# Altium PCB LeBot.PcbDoc (part 2 of 2)
Units mm, origin at the board's own origin, x right, y up, seen from the top; angles counter-clockwise.
Board outline 72.75 x 51.14 mm, 4 copper layers (Top Layer, Low Impedance, Power, Bottom Layer), stack 0.778 mm thick; 105 components, 96 nets, 418 pads, 258 vias.
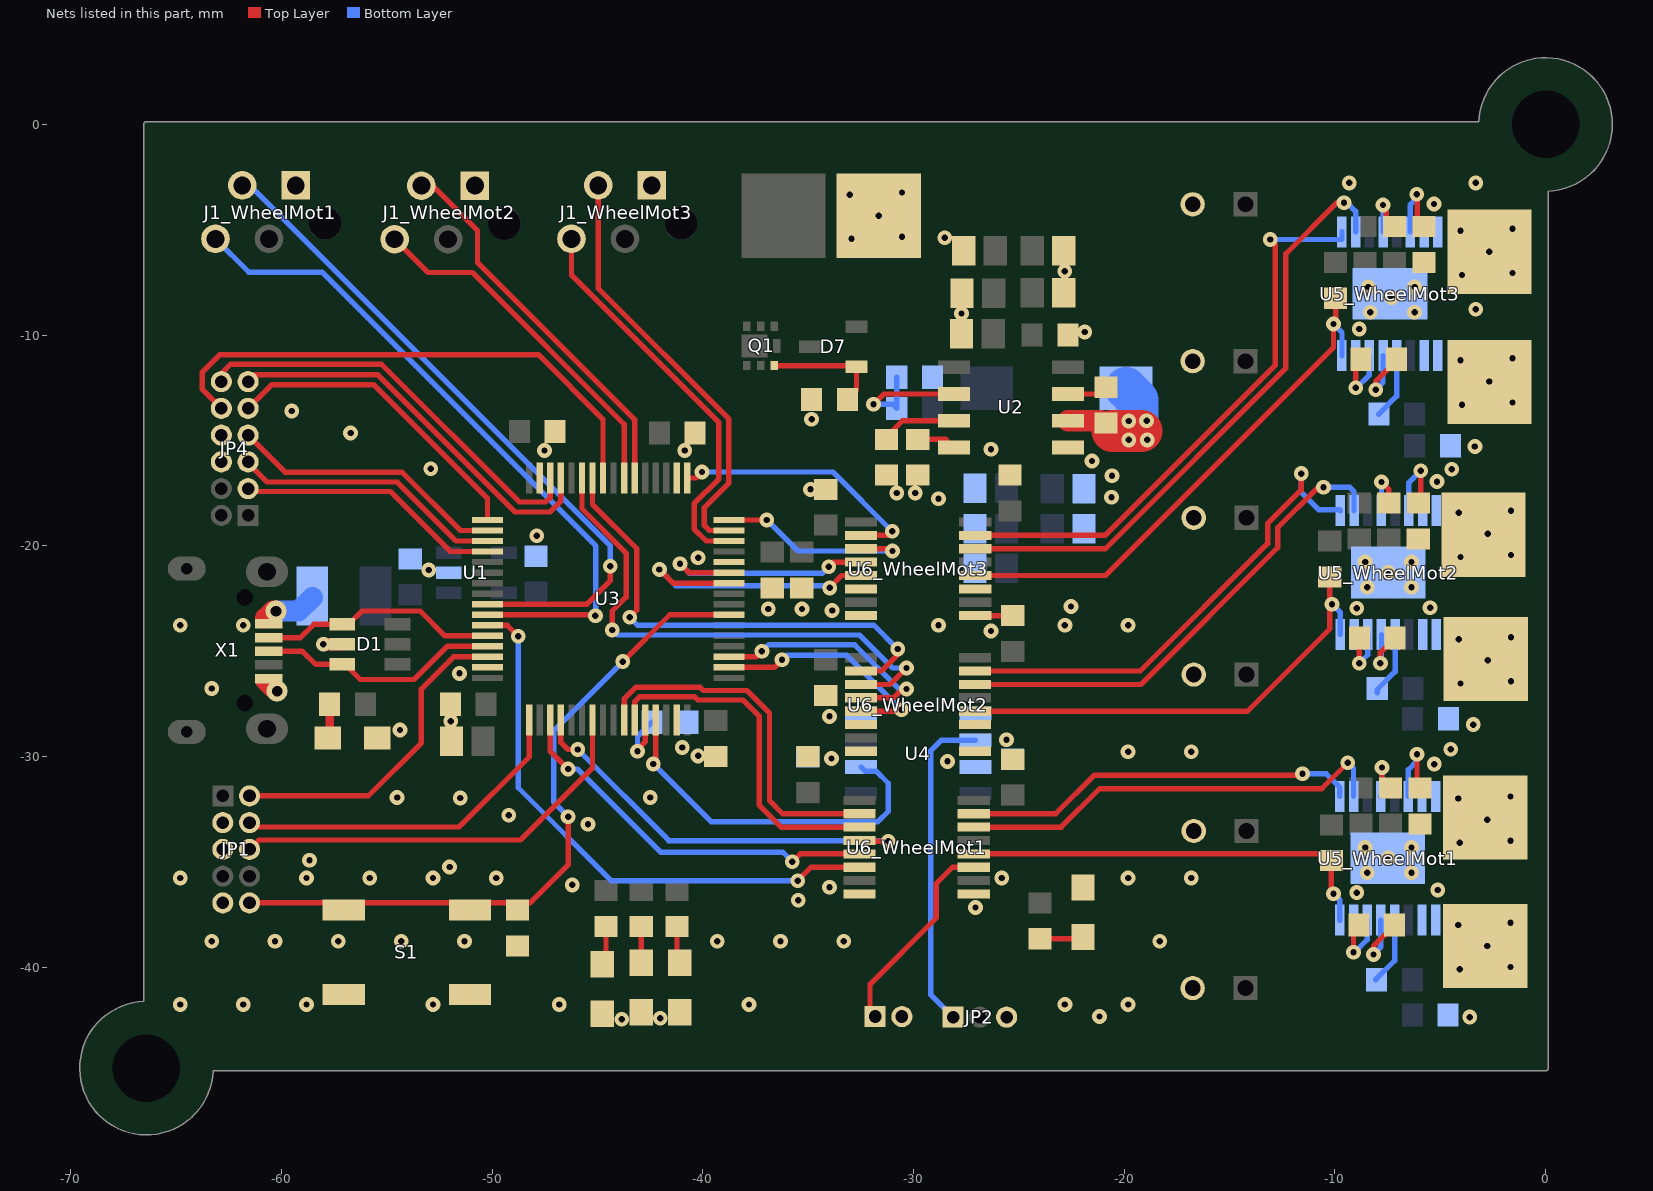
[diagram p4: the nets of this part, all layers, seen from the top]

## Via types
v1: diameter 0.7, hole 0.3, Top Layer to Bottom Layer, 256 vias
v2: diameter 1, hole 0.5, Top Layer to Bottom Layer, 2 vias

## Nets (pads, with @x,y where several pads share a name; then routed paths per layer and width w, separated by ;. In a path a pad name is that pad's centre, name@x,y a point inside that pad or via, vN(x,y) a via of type N, cw(c..) or ccw(c..) an arc to the next point about the centre after c; other vN are vias at no path point) (continued)
FREE2: JP4.10 U3.25 | length 25.5
  Top Layer w0.254: JP4.10@-62.861,-13.48 -63.761,-12.58 -63.761,-11.757 -62.933,-10.929 -47.812,-10.929 -44.741,-14 U3.25@-44.741,-16.787
FREE3: JP4.3 U3.36 | length 12.6
  Top Layer w0.254: JP4.3@-61.591,-17.4 -61.564,-17.427 -54.839,-17.427 -51.991,-20.275 U3.36@-50.229,-20.275
FREE4: JP4.5 U3.35 | length 12.9
  Top Layer w0.254: JP4.5@-61.591,-16.075 -60.693,-16.973 -54.518,-16.973 -51.716,-19.775 U3.35@-50.229,-19.775
FREE5: JP4.7 U3.34 | length 13.2
  Top Layer w0.254: JP4.7@-61.591,-14.75 -59.822,-16.519 -54.272,-16.519 -51.516,-19.275 U3.34@-50.229,-19.275
GND: C1.1 C2.1 C11.1 C12.1 C13.1 C14.1 C15.1 C16.1 C17.1 C18.1 C26_WheelMot1.1 C26_WheelMot2.1 C26_WheelMot3.1 C32.1 D1.2 D3.2 D4.2 D5.2 D6.2 J1_WheelMot1.1 J1_WheelMot2.1 J1_WheelMot3.1 JP1.3 JP1.5 JP1.9 JP4.6 JP4.8 R7.1 S1.2 U1.2 U3.12 U3.18 U3.31 U3.47 U3.63 U4.4 U6_WheelMot1.8 U6_WheelMot2.8 U6_WheelMot3.8 X1.GND | length 1.8
  Top Layer w0.6: X1.GND@-60.941,-26.475 -60.516,-26.9 v2(-60.216,-26.9) ; v1@-57.991,-24.7 -57.966,-24.675 D1.2@-57.116,-24.675
  other v1: -43.854,-42.475 -42.029,-42.425 -64.816,-41.775 -61.816,-41.775 -58.816,-41.775 -52.816,-41.775 -46.816,-41.775 -37.816,-41.775 -63.316,-38.775 -60.316,-38.775 -57.316,-38.775 -54.316,-38.775 -51.316,-38.775 -39.316,-38.775 -36.316,-38.775 -33.316,-38.775 -35.475,-36.825 -33.991,-36.212 -46.2,-36.1 -64.816,-35.775 -58.816,-35.775 -55.816,-35.775 -52.816,-35.775 -49.816,-35.775 -52.025,-35.25 -58.675,-34.925 -45.454,-33.215 -49.216,-32.796 -51.516,-31.975 -54.516,-31.95 -42.5,-31.95 -33.9,-30.1 -40.229,-29.975 -40.979,-29.575 -54.379,-28.75 -51.966,-28.325 -33.991,-28.1 -63.316,-26.775 -51.554,-26.06 -58.016,-24.675 -64.816,-23.775 -61.816,-23.775 -33.867,-23.075 -36.9,-23 -35.3,-23 -53.016,-21.15 -40.229,-20.575 -47.891,-19.525 -34.893,-17.325 -52.925,-16.35 -47.516,-15.475 -40.866,-15.475 -56.725,-14.65 -59.52,-13.6
GND_B: C3.1 C4.1 C5.1 C7.1 C8.1 C9.1 C10.1 C19.1 C20.1 C21.1 C22.1 C25_WheelMot1.1 C25_WheelMot2.1 C25_WheelMot3.1 C27_WheelMot1.1 C27_WheelMot2.1 C27_WheelMot3.1 C28.1 C29.1 C30_WheelMot1.2 C30_WheelMot2.2 C30_WheelMot3.2 C31_WheelMot1.2 C31_WheelMot2.2 C31_WheelMot3.2 C33.1 D2.2 J3.1 JP2.3 JP3.2 R3.1 R13_WheelMot1.1 R13_WheelMot2.1 R13_WheelMot3.1 R14.2 U2.5 U4.5 U4.7 U5_WheelMot1.7 U5_WheelMot1.9 U5_WheelMot1.15 U5_WheelMot1.17 U5_WheelMot2.7 U5_WheelMot2.9 U5_WheelMot2.15 U5_WheelMot2.17 U5_WheelMot3.7 U5_WheelMot3.9 U5_WheelMot3.15 U5_WheelMot3.17 U6_WheelMot1.9 U6_WheelMot2.9 U6_WheelMot3.9 | length 1.8
  Top Layer w0.254: U6_WheelMot3.9@-27.069,-23.316 -25.295,-23.316 C27_WheelMot2.1@-25.291,-23.312
  other v1: -3.6,-42.375 -21.171,-42.35 -22.816,-41.775 -19.816,-41.775 -18.316,-38.775 -27.063,-37.175 -8.966,-36.465 -5.116,-36.34 -25.816,-35.775 -19.816,-35.775 -16.816,-35.775 -8.466,-35.525 -6.366,-35.525 -7.466,-34.825 -8.566,-34.325 -6.366,-34.325 -5.279,-30.365 -28.391,-30.237 -19.816,-29.775 -16.816,-29.775 -4.504,-29.665 -25.591,-29.212 -3.429,-28.49 -26.329,-24.05 -28.816,-23.775 -22.816,-23.775 -19.816,-23.775 -8.966,-22.965 -5.48,-22.94 -22.525,-22.882 -8.466,-21.975 -6.366,-21.975 -7.466,-21.275 -8.566,-20.775 -6.366,-20.775 -28.816,-17.775 -20.604,-17.7 -30.798,-17.5 -29.916,-17.5 -5.15,-16.956 -20.58,-16.675 -4.454,-16.365 -21.529,-15.975 -26.329,-15.425 -3.354,-15.29 -34.841,-14 -21.875,-9.85 -8.841,-9.715 -27.725,-8.975 -8.316,-8.915 -6.216,-8.915 -3.316,-8.775 -7.316,-8.215 -8.416,-7.715 -6.216,-7.715 -22.825,-6.975 -32.948,-5.431 -28.525,-5.375 -30.548,-5.331 -31.648,-4.331 -5.291,-3.78 -33.023,-3.331 -30.548,-3.231 -9.316,-2.775 -3.316,-2.775
IN1_B_WheelMot1: U5_WheelMot1.1 U6_WheelMot1.15 | length 18.8
  Top Layer w0.254: U6_WheelMot1.15@-27.141,-32.721 -23.255,-32.721 -21.434,-30.9 v1@-11.6,-30.9 ; v1@-11.6,-30.884 v1(-11.541,-30.825)
  Bottom Layer w0.254: v1(-11.541,-30.825) -10.416,-30.825 -9.766,-31.475 U5_WheelMot1.1@-9.766,-31.9
IN1_B_WheelMot2: U5_WheelMot2.1 U6_WheelMot2.15 | length 23.5
  Top Layer w0.254: U6_WheelMot2.15@-27.08,-25.949 -19.24,-25.949 -13.19,-19.898 -13.19,-18.951 -11.6,-17.361 v1(-11.6,-16.575)
  Bottom Layer w0.254: v1(-11.6,-16.575) -11.6,-17.456 -10.769,-18.287 -9.791,-18.287 U5_WheelMot2.1@-9.741,-18.337
IN1_B_WheelMot3: U5_WheelMot3.1 U6_WheelMot3.15 | length 27.4
  Top Layer w0.254: U6_WheelMot3.15@-27.063,-19.512 U6_WheelMot3.15@-27.069,-19.506 -20.906,-19.506 -12.825,-11.425 -12.825,-5.706 v1(-13.066,-5.465)
  Bottom Layer w0.254: v1(-13.066,-5.465) -9.666,-5.465 U5_WheelMot3.1@-9.666,-5.1
IN2_B_WheelMot1: U5_WheelMot1.2 U6_WheelMot1.14 | length 20.7
  Top Layer w0.254: U6_WheelMot1.14@-27.141,-33.357 -22.992,-33.357 -21.171,-31.536 -10.627,-31.536 v1(-9.391,-30.3)
  Bottom Layer w0.254: v1(-9.391,-30.3) -9.116,-30.575 U5_WheelMot1.2@-9.116,-31.9
IN2_B_WheelMot2: U5_WheelMot2.2 U6_WheelMot2.14 | length 23.4
  Top Layer w0.254: U6_WheelMot2.14@-27.08,-26.585 -19.21,-26.585 -12.718,-20.093 -12.718,-19.146 -10.797,-17.225 v1(-10.541,-17.225)
  Bottom Layer w0.254: v1(-10.541,-17.225) -9.291,-17.225 -9.091,-17.425 U5_WheelMot2.2@-9.091,-18.337
IN2_B_WheelMot3: U5_WheelMot3.2 U6_WheelMot3.14 | length 29.2
  Top Layer w0.254: U6_WheelMot3.14@-27.069,-20.142 -20.9,-20.142 -12.325,-11.567 -12.325,-6.14 -9.9,-3.715 v1(-9.566,-3.715)
  Bottom Layer w0.254: v1(-9.566,-3.715) -9.426,-3.715 -9.016,-4.125 U5_WheelMot3.2@-9.016,-5.1
M1_EN: U3.52 U6_WheelMot1.4 | length 19.9
  Top Layer w0.254: U3.52@-46.741,-28.263 -46.741,-29.338 -46.404,-29.675 v1(-45.941,-29.675) ; U6_WheelMot1.4@-32.563,-33.991 -32.529,-34.025 v1(-31.204,-34.025)
  Bottom Layer w0.254: v1(-45.941,-29.675) -41.616,-34 v1@-31.179,-34
M1_ENC_A: J1_WheelMot1.3 U3.41 | length 32.2
  Top Layer w0.254: U3.41@-50.229,-22.775 -45.504,-22.775 -44.404,-21.675 v1(-44.404,-20.975)
  Bottom Layer w0.254: J1_WheelMot1.3@-61.541,-2.859 -44.404,-19.996 v1(-44.404,-20.975)
M1_ENC_B: J1_WheelMot1.4 U3.42 | length 32.8
  Top Layer w0.254: U3.42@-50.229,-23.275 -45.266,-23.275 -45.266,-23.475 -45.116,-23.325 v1(-45.104,-23.325)
  Bottom Layer w0.254: J1_WheelMot1.4@-63.14,-5.431 -61.56,-7.011 -58.089,-7.011 -45.081,-20.019 -45.081,-23.302 v1(-45.104,-23.325)
M1_PMODE: U3.51 U6_WheelMot1.5 | length 18.5
  Top Layer w0.254: U3.51@-47.241,-28.263 -47.241,-29.759 v1(-46.4,-30.6) ; v1(-35.754,-35) -35.381,-34.627 -32.598,-34.627 -32.58,-34.61 U6_WheelMot1.5@-32.563,-34.627
  Bottom Layer w0.254: v1(-46.4,-30.6) -45.951,-30.6 -42.008,-34.543 -36.211,-34.543 v1(-35.754,-35)
M1_PWM1: U3.58 U6_WheelMot1.2 | length 17.3
  Top Layer w0.254: U3.58@-43.741,-28.263 -43.741,-27.271 -43.192,-26.722 -40.132,-26.722 -39.983,-26.871 -37.909,-26.871 -36.839,-27.941 -36.839,-32.096 -36.215,-32.721 U6_WheelMot1.2@-32.563,-32.721
M1_PWM2: U3.59 U6_WheelMot1.3 | length 16.6
  Top Layer w0.254: U3.59@-43.241,-28.263 -43.241,-27.413 -43.004,-27.176 -40.391,-27.176 -40.242,-27.325 -38.097,-27.325 -37.334,-28.088 -37.334,-32.301 -36.263,-33.373 ; -36.246,-33.357 U6_WheelMot1.3@-32.563,-33.357
M2_EN: U3.3 U6_WheelMot2.4 | length 12
  Top Layer w0.254: U3.3@-38.753,-25.275 -37.463,-25.275 v1(-37.2,-25.012) ; U6_WheelMot2.4@-32.502,-27.219 -30.96,-27.219 -30.463,-26.722 -30.385,-26.8 v1(-30.336,-26.8)
  Bottom Layer w0.254: v1(-37.2,-25.012) -36.888,-24.7 -32.797,-24.7 -30.697,-26.8 v1(-30.336,-26.8) -30.336,-26.754 v1@-30.369,-26.722
M2_ENC_A: J1_WheelMot2.3 U3.22 | length 18.4
  Top Layer w0.254: J1_WheelMot2.3@-53.366,-2.909 -52.833,-2.909 -50.7,-5.041 -50.7,-6.554 -43.241,-14.013 U3.22@-43.241,-16.787
M2_ENC_B: J1_WheelMot2.4 U3.23 | length 17.1
  Top Layer w0.254: J1_WheelMot2.4@-54.636,-5.449 -53.056,-7.029 -50.946,-7.029 -43.741,-14.233 U3.23@-43.741,-16.787
M2_PMODE: U3.2 U6_WheelMot2.5 | length 11.7
  Top Layer w0.254: U3.2@-38.753,-25.775 -36.609,-25.775 v1(-36.246,-25.412) ; U6_WheelMot2.5@-32.502,-27.855 -30.701,-27.855 -30.574,-27.983 v1(-30.574,-27.791)
  Bottom Layer w0.254: v1(-36.246,-25.412) -36.034,-25.2 -33.165,-25.2 v1(-30.574,-27.791)
M2_PWM1: U3.26 U6_WheelMot2.2 | length 23.3
  Top Layer w0.254: U3.26@-45.241,-16.787 -45.241,-18.038 -43.141,-20.138 -43.141,-23.062 v1(-43.479,-23.4) ; U6_WheelMot2.2@-32.502,-25.949 -31.524,-25.949 -30.754,-25.179 v1(-30.754,-24.9)
  Bottom Layer w0.254: v1(-43.479,-23.4) -43.104,-23.775 -31.879,-23.775 v1(-30.754,-24.9)
M2_PWM2: U3.27 U6_WheelMot2.3 | length 25.6
  Top Layer w0.254: U3.27@-45.741,-16.787 -45.741,-18.245 -43.641,-20.345 -43.641,-22.437 -44.304,-23.1 v1(-44.304,-24) ; U6_WheelMot2.3@-32.502,-26.585 -31.121,-26.585 v1(-30.336,-25.8)
  Bottom Layer w0.254: v1(-44.304,-24) -44.067,-24.237 -32.563,-24.237 -31,-25.8 v1(-30.336,-25.8)
M3_EN: U3.11 U6_WheelMot3.4 | length 11.5
  Top Layer w0.254: v1(-41.091,-20.85) -40.666,-21.275 U3.11@-38.753,-21.275 ; v1(-34.029,-21) -33.805,-20.776 U6_WheelMot3.4@-32.491,-20.776
  Bottom Layer w0.254: v1(-41.091,-20.85) -40.641,-21.3 -34.329,-21.3 v1(-34.029,-21)
M3_ENC_A: J1_WheelMot3.3 U3.15 | length 20.5
  Top Layer w0.254: J1_WheelMot3.3@-44.97,-2.891 -44.97,-7.78 -38.766,-13.984 -38.766,-17.025 -39.941,-18.2 -39.941,-19.025 -39.691,-19.275 U3.15@-38.753,-19.275
M3_ENC_B: J1_WheelMot3.4 U3.14 | length 19.1
  Top Layer w0.254: J1_WheelMot3.4@-46.24,-5.431 -46.24,-7.152 -39.241,-14.151 -39.241,-16.828 -40.416,-18.003 -40.416,-19.2 -39.841,-19.775 U3.14@-38.753,-19.775
M3_PMODE: U3.10 U6_WheelMot3.5 | length 13.8
  Top Layer w0.254: v1(-42.066,-21.125) -41.416,-21.775 U3.10@-38.753,-21.775 ; v1(-33.979,-22) -33.979,-21.975 -33.416,-21.412 U6_WheelMot3.5@-32.491,-21.412
  Bottom Layer w0.254: v1(-42.066,-21.125) -41.291,-21.9 -34.079,-21.9 v1(-33.979,-22)
M3_PWM1: U3.17 U6_WheelMot3.2 | length 12.6
  Top Layer w0.254: U3.17@-40.741,-16.787 -40.328,-16.787 v1(-40.041,-16.5) ; U6_WheelMot3.2@-32.491,-19.506 -31.21,-19.506 v1(-31.016,-19.312)
  Bottom Layer w0.254: v1(-40.041,-16.5) -33.828,-16.5 v1(-31.016,-19.312)
M3_PWM2: U3.16 U6_WheelMot3.3 | length 9.9
  Top Layer w0.254: U3.16@-38.753,-18.775 v1@-37.004,-18.775 ; U6_WheelMot3.3@-32.491,-20.142 -31.112,-20.142 v1(-31.004,-20.25)
  Bottom Layer w0.254: v1(-36.965,-18.775) -35.49,-20.25 v1(-31.004,-20.25)
MOT_POW_1_WheelMot1: J6_WheelMot1.1 U5_WheelMot1.8
  other v1: -4.066,-34.1 -1.666,-34 -2.766,-33 -4.141,-32 -1.666,-31.9
MOT_POW_1_WheelMot2: J6_WheelMot2.1 U5_WheelMot2.8
  other v1: -4.041,-20.537 -1.641,-20.437 -2.741,-19.437 -4.116,-18.437 -1.641,-18.337
MOT_POW_1_WheelMot3: J6_WheelMot3.1 U5_WheelMot3.8
  other v1: -3.966,-7.15 -1.566,-7.05 -2.666,-6.05 -4.041,-5.05 -1.566,-4.95
MOT_POW_2_WheelMot1: J7_WheelMot1.1 U5_WheelMot1.10
  other v1: -4.066,-40.1 -1.666,-40 -2.766,-39 -4.141,-38 -1.666,-37.9
MOT_POW_2_WheelMot2: J7_WheelMot2.1 U5_WheelMot2.10
  other v1: -4.041,-26.537 -1.641,-26.437 -2.741,-25.437 -4.116,-24.437 -1.641,-24.337
MOT_POW_2_WheelMot3: J7_WheelMot3.1 U5_WheelMot3.10
  other v1: -3.966,-13.3 -1.566,-13.2 -2.666,-12.2 -4.041,-11.2 -1.566,-11.1
MPU_INT: JP4.9 U3.33 | length 15.1
  Top Layer w0.254: JP4.9@-61.591,-13.48 -60.461,-12.35 -55.641,-12.35 -50.229,-17.762 U3.33@-50.229,-18.775
MPU_SCL: JP4.11 U3.29 | length 19
  Top Layer w0.254: JP4.11@-61.591,-12.21 -61.256,-11.875 -55.441,-11.875 -48.916,-18.4 -47.266,-18.4 -46.741,-17.875 U3.29@-46.741,-16.787
MPU_SDA: JP4.12 U3.30 | length 19.7
  Top Layer w0.254: JP4.12@-62.861,-12.21 -62.861,-11.82 -62.424,-11.383 -55.258,-11.383 -48.716,-17.925 -47.466,-17.925 -47.241,-17.7 U3.30@-47.241,-17.025
NetC6_1: C6.1 L1.1 U2.6 | length 5.4
  Top Layer w1: U2.6@-22.663,-14.065 -21.098,-14.065 C6.1@-20.925,-14.238
  Top Layer w2: C6.1@-20.563,-14.55 -19.188,-14.55
  Bottom Layer w2: L1.1@-19.919,-12.525 -19.369,-13.075 -19.369,-14.5
  other v1: -19.788,-14.975 -18.913,-14.975 -19.788,-14.075 -18.938,-14.065
NetC6_2: C6.2 U2.7 | length 1.9
  Top Layer w0.254: U2.7@-22.663,-12.795 -21.058,-12.795 C6.2@-20.863,-12.6
NetC7_2: C7.2 U2.3 | length 3.3
  Top Layer w0.254: C7.2@-31.148,-14.682 -30.531,-14.065 U2.3@-28.087,-14.065
NetC8_2: C8.2 U2.4 | length 1.9
  Top Layer w0.254: C8.2@-29.798,-14.95 -28.472,-14.95 U2.4@-28.087,-15.335
NetC23_WheelMot1_1: C23_WheelMot1.1 U5_WheelMot1.13 | length 3.6
  Top Layer w0.254: v1(-8.166,-39.4) -8.166,-39 C23_WheelMot1.1@-7.166,-38
  Bottom Layer w0.254: v1(-8.166,-39.4) -7.816,-39.05 U5_WheelMot1.13@-7.816,-37.776
NetC23_WheelMot1_2: C23_WheelMot1.2 U5_WheelMot1.14 | length 3.2
  Top Layer w0.254: v1(-9.116,-39.3) -9.116,-38.25 C23_WheelMot1.2@-8.866,-38
  Bottom Layer w0.254: v1(-9.116,-39.3) -9.066,-39.3 -8.466,-38.7 U5_WheelMot1.14@-8.466,-37.776
NetC23_WheelMot2_1: C23_WheelMot2.1 U5_WheelMot2.13 | length 2.9
  Top Layer w0.254: v1(-7.841,-25.575) -7.841,-25.075 C23_WheelMot2.1@-7.141,-24.375
  Bottom Layer w0.254: v1(-7.841,-25.575) -7.791,-25.525 U5_WheelMot2.13@-7.791,-24.213
NetC23_WheelMot2_2: C23_WheelMot2.2 U5_WheelMot2.14 | length 2.7
  Top Layer w0.254: v1(-8.841,-25.575) C23_WheelMot2.2@-8.841,-24.375
  Bottom Layer w0.254: v1(-8.841,-25.575) -8.441,-25.175 U5_WheelMot2.14@-8.441,-24.213
NetC23_WheelMot3_1: C23_WheelMot3.1 U5_WheelMot3.13 | length 3.6
  Top Layer w0.254: v1(-8.066,-12.6) -8.066,-12.2 C23_WheelMot3.1@-7.066,-11.2
  Bottom Layer w0.254: v1(-8.066,-12.6) -7.716,-12.25 U5_WheelMot3.13@-7.716,-10.976
NetC23_WheelMot3_2: C23_WheelMot3.2 U5_WheelMot3.14 | length 3.2
  Top Layer w0.254: v1(-9.016,-12.5) -9.016,-11.45 C23_WheelMot3.2@-8.766,-11.2
  Bottom Layer w0.254: v1(-9.016,-12.5) -8.966,-12.5 -8.366,-11.9 U5_WheelMot3.14@-8.366,-10.976
NetC24_WheelMot1_1: C24_WheelMot1.1 U5_WheelMot1.12 | length 3.2
  Bottom Layer w0.254: C24_WheelMot1.1@-8.066,-40.6 -7.166,-39.7 U5_WheelMot1.12@-7.166,-37.776
NetC24_WheelMot2_1: C24_WheelMot2.1 U5_WheelMot2.12 | length 3.1
  Bottom Layer w0.254: C24_WheelMot2.1@-7.991,-26.975 -7.991,-26.825 -7.141,-25.975 U5_WheelMot2.12@-7.141,-24.213
NetC24_WheelMot3_1: C24_WheelMot3.1 U5_WheelMot3.12 | length 3.1
  Bottom Layer w0.254: C24_WheelMot3.1@-7.916,-13.75 -7.066,-12.9 U5_WheelMot3.12@-7.066,-10.976
NetD2_1: D2.1 R8.1 | length 2.1
  Top Layer w0.254: R8.1@-24.004,-38.655 -22.03,-38.655 D2.1@-21.95,-38.575
NetD3_1: D3.1 R2.1 | length 1.6
  Top Layer w0.4: D3.1@-57.816,-29.125 -57.716,-29.025 R2.1@-57.716,-27.525
NetD4_1: D4.1 R4.1 | length 1.9
  Top Layer w0.254: D4.1@-44.779,-39.865 -44.604,-39.69 R4.1@-44.604,-38.075
NetD5_1: D5.1 R5.1 | length 1.7
  Top Layer w0.254: D5.1@-42.929,-39.8 R5.1@-42.929,-38.075
NetD6_1: D6.1 R6.1 | length 1.8
  Top Layer w0.254: R6.1@-41.229,-38.075 -41.229,-39.675 D6.1@-41.104,-39.8
NetD7_1: D7.1 Q1.2 R14.1 | length 5.6
  Top Layer w0.254: Q1.2@-36.613,-11.45 -32.763,-11.45 D7.1@-32.713,-11.5 -32.713,-12.622 R14.1@-33.141,-13.05
NetF1_1: F1.1 X1.VCC | length 2.6
  Top Layer w1: -60.751,-23.435 -60.416,-23.1 v2(-60.266,-23.1)
  Bottom Layer w1: v2(-60.266,-23.1) -59.191,-23.1 F1.1@-58.541,-22.45
NetR1_1: R1.1 R3.2 U2.2 | length 6.7
  Top Layer w0.254: v1(-31.898,-13.284) -31.41,-12.795 U2.2@-28.087,-12.795
  Bottom Layer w0.254: v1(-31.898,-13.284) -30.994,-13.284 R1.1@-30.798,-13.48 R3.2@-30.798,-12
NetR7_2: R7.2 U3.60 | length 3.3
  Top Layer w0.254: v1(-43.104,-29.75) -43.104,-29.675 -42.741,-29.312 U3.60@-42.741,-28.263
  Bottom Layer w0.254: v1(-43.104,-29.75) -43.104,-29.062 R7.2@-42.416,-28.375
NetR11_WheelMot1_1: R11_WheelMot1.1 U5_WheelMot1.4 | length 2.5
  Top Layer w0.254: v1(-7.766,-30.525) -7.766,-31.1 R11_WheelMot1.1@-7.366,-31.5
  Bottom Layer w0.254: U5_WheelMot1.4@-7.816,-31.9 -7.766,-31.85 v1(-7.766,-30.525)
NetR11_WheelMot2_1: R11_WheelMot2.1 U5_WheelMot2.4 | length 2.5
  Top Layer w0.254: v1(-7.791,-16.975) -7.441,-17.325 R11_WheelMot2.1@-7.441,-17.975
  Bottom Layer w0.254: U5_WheelMot2.4@-7.791,-18.337 v1(-7.791,-16.975)
NetR11_WheelMot3_1: R11_WheelMot3.1 U5_WheelMot3.4 | length 2
  Top Layer w0.254: v1(-7.716,-3.825) -7.566,-3.975 R11_WheelMot3.1@-7.566,-4.525
  Bottom Layer w0.254: U5_WheelMot3.4@-7.716,-5.1 v1(-7.716,-3.825)
NetR13_WheelMot1_2: R13_WheelMot1.2 U5_WheelMot1.6 | length 3.9
  Top Layer w0.254: v1(-6.1,-29.9) -6.1,-31.154 -6.206,-31.26 R13_WheelMot1.2@-5.966,-31.5
  Bottom Layer w0.254: U5_WheelMot1.6@-6.516,-31.9 -6.516,-30.635 -6.1,-30.219 v1(-6.1,-29.9)
NetR13_WheelMot2_2: R13_WheelMot2.2 U5_WheelMot2.6 | length 3.8
  Top Layer w0.254: R13_WheelMot2.2@-6.041,-17.975 -6.141,-17.875 -5.925,-17.659 v1(-5.925,-16.437)
  Bottom Layer w0.254: U5_WheelMot2.6@-6.491,-18.337 -6.491,-17.467 -6.487,-17.463 -6.487,-16.999 v1(-5.925,-16.437)
NetR13_WheelMot3_2: R13_WheelMot3.2 U5_WheelMot3.6 | length 3.5
  Top Layer w0.254: v1(-6.116,-3.32) -6.091,-3.345 R13_WheelMot3.2@-6.091,-4.875
  Bottom Layer w0.254: U5_WheelMot3.6@-6.416,-5.1 -6.416,-3.8 -6.116,-3.5 v1(-6.116,-3.32)
NetU6_WheelMot2_6: U6_WheelMot2.6
NetU6_WheelMot2_11: U6_WheelMot2.11
NetU6_WheelMot3_6: U6_WheelMot3.6
NetU6_WheelMot3_11: U6_WheelMot3.11
PMODE_B_WheelMot1: R9_WheelMot1.1 U5_WheelMot1.16 U6_WheelMot1.12 | length 20
  Top Layer w0.254: U6_WheelMot1.12@-27.141,-34.627 -10.714,-34.627 -10.166,-35.175 -10.166,-36.425 v1(-10.066,-36.525)
  Bottom Layer w0.254: v1(-10.066,-36.525) -9.766,-36.825 U5_WheelMot1.16@-9.766,-37.776
PMODE_B_WheelMot2: R9_WheelMot2.1 U5_WheelMot2.16 U6_WheelMot2.12 | length 22.5
  Top Layer w0.254: U6_WheelMot2.12@-27.08,-27.855 -14.155,-27.855 -10.241,-23.941 R9_WheelMot2.1@-10.241,-21.475
  Bottom Layer w0.254: v1(-10.141,-22.775) -9.741,-23.175 U5_WheelMot2.16@-9.741,-24.213
PMODE_B_WheelMot3: R9_WheelMot3.1 U5_WheelMot3.16 U6_WheelMot3.12 | length 25.5
  Top Layer w0.254: U6_WheelMot3.12@-27.069,-21.412 -20.885,-21.412 -10.066,-10.592 v1(-10.066,-9.475) -9.966,-9.375 R9_WheelMot3.1@-9.966,-8.25
  Bottom Layer w0.254: v1(-10.066,-9.475) -9.666,-9.875 U5_WheelMot3.16@-9.666,-10.976
PWM_SERV: U3.61 U4.2 | length 17.6
  Top Layer w0.254: v1(-42.354,-30.362) -42.241,-30.25 U3.61@-42.241,-28.263
  Bottom Layer w0.254: v1(-42.354,-30.362) -39.616,-33.1 -31.694,-33.1 -31.204,-32.609 -31.204,-31.275 -31.779,-30.7 -32.298,-30.7 U4.2@-32.491,-30.507
PWM_SERV_B: JP2.1 U4.6 | length 15.4
  Bottom Layer w0.254: JP2.1@-28.124,-42.375 -29.191,-41.308 -29.191,-29.737 -28.691,-29.237 U4.6@-27.067,-29.237
RESET: C18.2 JP1.10 S1.1 U3.7 | length 33.1
  Top Layer w0.254: JP1.10@-61.521,-36.955 -51.05,-36.955 -48.205,-36.955 -46.4,-35.15 v1(-46.4,-32.86) ; v1(-43.8,-25.5) -41.575,-23.275 U3.7@-38.753,-23.275
  Bottom Layer w0.254: v1(-46.4,-32.86) -47.077,-32.183 -47.077,-28.777 v1(-43.8,-25.5)
SWCLK: JP1.4 U3.49 | length 16.7
  Top Layer w0.254: JP1.4@-61.666,-33 -61.316,-33.35 -51.575,-33.35 -48.241,-30.016 U3.49@-48.241,-28.263
SWDIO: JP1.2 U3.46 | length 15.5
  Top Layer w0.254: JP1.2@-61.521,-31.875 -55.888,-31.875 -53.366,-29.353 -53.366,-26.8 -51.841,-25.275 U3.46@-50.229,-25.275
SWO: JP1.6 U3.55 | length 20.2
  Top Layer w0.254: JP1.6@-61.521,-34.415 -61.075,-33.969 -48.669,-33.969 -45.241,-30.541 U3.55@-45.241,-28.263
THRW_PWM: U3.43 U6_WheelMot1.6 | length 27.2
  Top Layer w0.254: U3.43@-50.229,-23.775 -49.291,-23.775 v1(-48.766,-24.3) ; v1(-35.504,-35.897) -34.868,-35.261 U6_WheelMot1.6@-32.563,-35.261
  Bottom Layer w0.254: v1(-48.766,-24.3) -48.766,-31.488 -44.357,-35.897 v1(-35.504,-35.897)
THRW_PWM_B: JP3.1 U6_WheelMot1.11 | length 9.5
  Top Layer w0.254: JP3.1@-32.068,-42.106 -32.068,-40.818 -28.922,-37.672 -28.922,-36.034 -28.15,-35.261 U6_WheelMot1.11@-27.141,-35.261
USB_DM: D1.1 U3.44 X1.D- | length 11.2
  Top Layer w0.254: X1.D-@-60.601,-24.36 -59.101,-24.36 -58.466,-23.725 D1.1@-57.116,-23.725 -56.816,-23.725 -56.189,-23.098 -53.418,-23.098 -52.241,-24.275 U3.44@-50.441,-24.275
USB_DP: D1.3 U3.45 X1.D+ | length 11.2
  Top Layer w0.254: X1.D+@-60.601,-25.01 -59.006,-25.01 -58.391,-25.625 D1.3@-57.116,-25.625 -56.991,-25.625 -56.266,-26.35 -53.716,-26.35 -52.141,-24.775 U3.45@-50.641,-24.775
pads on no net: D1.4 D1.6 D7.3 J1_WheelMot1. J1_WheelMot2. J1_WheelMot3. JP1.7 JP1.8 U1.4 U3.4 U3.5 U3.6 U3.8 U3.9 U3.20 U3.21 U3.24 U3.28 U3.37 U3.38 U3.39 U3.50 U3.53 U3.54 U6_WheelMot1.7 U6_WheelMot1.10 U6_WheelMot2.7 U6_WheelMot2.10 U6_WheelMot3.7 U6_WheelMot3.10 X1. X1.7 X1.ID

## Polygon pours and split planes (outlines as drawn)
GND_B on Top Layer "Top Layer-GND_B" (solid, remove dead copper, pour order 122): -36.024,-14.975 -39.425,-11.574 -39.425,-0.625 -0.65,-0.625 -0.65,-44.075 -36.225,-44.075 -29.475,-37.325 -29.475,-18.925 -33.425,-14.975
GND on Top Layer "Top Layer-GND" (solid, remove dead copper, pour order 80): -65.5,-44 -65.5,-0.625 -40.041,-0.625 -40.041,-11.834 -36.15,-15.725 -33.6,-15.725 -30.15,-19.175 -30.15,-36.813 -37.337,-44
no net on Top Layer "Top Layer-No Net 2" (solid, pour order 28): -39.004,-8.868
no net on Top Layer "Top Layer-No Net 3" (solid, pour order 24): 4.084,-43.25
no net on Top Layer "Top Layer-No Net 6" (solid, pour order 0): -65.916,-2.25
GND on Bottom Layer "Bottom Layer-GND" (solid, remove dead copper, pour order 74): -65.5,-44.05 -65.5,-0.675 -40.041,-0.675 -40.041,-12.709 -37.025,-15.725 -33.6,-15.725 -30.15,-19.175 -30.15,-36.813 -37.387,-44.05
GND_B on Bottom Layer "Bottom Layer-GND_B" (solid, remove dead copper, pour order 116): -36.7,-14.975 -39.425,-12.25 -39.425,-0.625 -0.65,-0.625 -0.65,-44.075 -36.225,-44.075 -29.475,-37.325 -29.475,-18.925 -33.425,-14.975
BAT on Bottom Layer "Bottom Layer-BAT" (solid, pour order 98): -6.275,-24.2 -6.275,-25.775 -5.658,-26.392 -5.658,-29.008 -6.125,-29.475 -9.85,-29.475 -10.425,-30.05 -11.225,-30.05 -11.225,-26.275 -11.065,-26.115 -8.865,-26.115 -6.8,-24.05
BAT on Bottom Layer "Bottom Layer-No Net 4" (solid, pour order 94): -6.625,-10.9 -6.987,-13.938 -7.081,-14.367 -11.025,-13.025 -11.025,-16.825 -5.741,-16.825 -5.705,-13.224 -6.116,-12.742 -6.116,-10.9
MOT_POW_1_WheelMot1 on Bottom Layer "Bottom Layer-MOT_POW_1_WheelMot1" (solid, pour order 114): -5.425,-31.6 -5.425,-33.275 -3.925,-34.775 -1.625,-34.775 -0.725,-33.875 -0.725,-31.475 -1.5,-30.7 -1.525,-30.725 -3.6,-30.725 -4.475,-31.6
MOT_POW_1_WheelMot2 on Bottom Layer "Bottom Layer-MOT_POW_1_WheelMot2" (solid, pour order 112): -5.4,-18.037 -5.4,-19.712 -3.9,-21.212 -1.6,-21.212 -0.7,-20.312 -0.7,-17.912 -1.475,-17.137 -1.5,-17.162 -3.575,-17.162 -4.45,-18.037
MOT_POW_1_WheelMot3 on Bottom Layer "Bottom Layer-MOT_POW_1_WheelMot3" (solid, pour order 110): -5.325,-4.8 -5.325,-6.475 -3.825,-7.975 -1.525,-7.975 -0.625,-7.075 -0.625,-4.675 -1.4,-3.9 -1.425,-3.925 -3.5,-3.925 -4.375,-4.8
MOT_POW_2_WheelMot3 on Bottom Layer "Bottom Layer-MOT_POW_2_WheelMot3" (solid, pour order 106): -6.116,-10.81 -6.116,-12.134 -4.076,-14.174 -1.486,-14.174 -0.825,-13.513 -0.825,-10.463 -1.425,-9.863 -3.5,-9.863 -5.275,-11.638 -5.35,-11.713
MOT_POW_2_WheelMot1 on Bottom Layer "Bottom Layer-MOT_POW_2_WheelMot1" (solid, pour order 102): -6.075,-37.776 -6.075,-39.016 -4.117,-40.974 -1.586,-40.974 -0.925,-40.313 -0.925,-37.263 -1.525,-36.663 -3.6,-36.663 -5.375,-38.438 -5.45,-38.513
MOT_POW_2_WheelMot2 on Bottom Layer "Bottom Layer-MOT_POW_2_WheelMot2" (solid, pour order 100): -6.05,-24.212 -6.05,-25.425 -4.064,-27.411 -1.561,-27.411 -0.9,-26.75 -0.9,-23.7 -1.5,-23.1 -3.575,-23.1 -5.35,-24.875 -5.425,-24.95
BAT on Bottom Layer "Bottom Layer-No Net 4" (solid, pour order 92): -6.725,-37.7 -7.087,-40.738 -7.181,-41.167 -11.125,-39.825 -11.125,-43.4 -5.8,-43.4 -5.475,-41.6 -5.475,-40.304 -6.216,-39.129 -6.216,-38.391 -6.216,-37.7
GND on Power "Power-GND" (solid, remove dead copper, pour order 76): -65.5,-44 -65.5,-0.6 -40.041,-0.6 -40.041,-12.734 -37.05,-15.725 -33.6,-15.725 -30.15,-19.175 -30.15,-36.813 -37.337,-44
GND_B on Power "Power-GND_B" (solid, remove dead copper, pour order 118): -36.7,-14.975 -39.425,-12.25 -39.425,-0.625 -0.65,-0.625 -0.65,-44.075 -36.225,-44.075 -29.475,-37.325 -29.475,-18.925 -33.425,-14.975
BAT on Power "Power-BAT" (solid, pour order 84): -36.3,-10.25 -37.15,-9.4 -37.15,-7.525 -36.275,-6.65 -30.925,-6.65 -26.125,-1.85 -13,-1.85 -10.3,-4.55 -10.3,-42.725 -10.825,-43.25 -13.975,-43.25 -15.275,-41.95 -15.275,-11.225 -18.05,-8.45 -27.3,-8.45 -29.1,-10.25
3V3 on Power "Power-3V3" (solid, pour order 72): -63.6,-34.375 -64.4,-33.575 -64.4,-31.713 -62.937,-30.25 -60.225,-30.25 -59,-29.025 -59,-20.65 -59.725,-19.925 -62.875,-19.925 -65.125,-17.675 -65.125,-3 -63.25,-1.125 -41.825,-1.125 -40.041,-2.909 -40.041,-12.709 -37.025,-15.725 -33.6,-15.725 -30.15,-19.175 -30.15,-27.875 -34.525,-32.25 -36.525,-32.25 -38.625,-30.15 -38.625,-27.375 -41.175,-24.825 -44.675,-24.825 -45.45,-24.05 -49.075,-24.05 -49.906,-24.881 -49.906,-30.706 -53.575,-34.375
no net on Power "Power-No Net" (solid, pour order 64): -47,-22.6
GND on Low Impedance "Low Impedance-GND" (solid, remove dead copper, pour order 78): -65.5,-44 -65.5,-0.6 -40.041,-0.6 -40.041,-12.734 -37.05,-15.725 -33.6,-15.725 -30.15,-19.175 -30.15,-36.813 -37.337,-44
GND_B on Low Impedance "Low Impedance-GND_B" (solid, remove dead copper, pour order 120): -36.7,-14.975 -39.425,-12.25 -39.425,-0.625 -0.65,-0.625 -0.65,-44.075 -36.225,-44.075 -29.475,-37.325 -29.475,-18.925 -33.425,-14.975

## Silkscreen, mask and mechanical layers (free items; w line width, h text height)
Top Overlay:
  text "-" at -31.148,-0.075 h4.5 r180
  text "+" at -34.792,-2.05 h4.5 r90
  text "BAT" at -28.391,-4.331 h4.5
  text "MOT1" at -62.1,-9.05 h2.5
  text "MOT2" at -53.716,-9.05 h2.5
  text "MOT3" at -45.054,-9.075 h2.5
  text "M3_P1" at -4.75,-9.325 h1.5
  text "M3_P2" at -4.775,-15.725 h1.5
  text "FREE" at -58.55,-17.8 h2 r90
  text "M2_P1" at -4.85,-22.94 h1.5
  text "M2_P2" at -5,-28.8 h1.5
  text "3V3" at -65.6,-32.175 h1
  text "SWDIO" at -60.416,-32.175 h1
  text "SWCLK" at -60.326,-33.35 h1
  text "SWO" at -60.275,-34.65 h1
  text "GND" at -64.125,-34.725 h1 r90
  text "M1_P1" at -4.825,-36.25 h1.5
  text "RST" at -60.3,-37.225 h1
  text "GND" at -65.896,-37.35 h1
  text "PWM" at -31.65,-40.875 h1 r90
  text "GND_B" at -30.35,-40.9 h1 r90
  text "PWM" at -27.925,-41.05 h1 r90
  text "GND_B" at -25.275,-41.075 h1 r90
  text "5V_B" at -26.575,-41.1 h1 r90
  text "M1_P2" at -4.875,-42.3 h1.5
  text "THROW" at -38.475,-42.75 h1.5
  text "SERVO" at -24.15,-42.825 h1.5
Mechanical 1:
  lines w0.254: -66.416,-41.759 ccw(c-66.416,-44.8) -63.375,-44.8 ; -66.416,-41.712 -66.416,0 -3.069,0 ; -63.329,-44.8 0,-44.8 0,-3.069 ; -3.041,0 cw(c0,0) 0,-3.041

## Text inside footprints (layer, text, board x,y; h text height)
JP1: Top Overlay "9" at -63.299,-38.375 h1 r270; Top Overlay "1" at -63.299,-30.275 h1 r270
JP4: Top Overlay "1" at -61.083,-20.084 h1 r90; Top Overlay "11" at -61.083,-10.94 h1 r90